# Altium PCB Tesla_MMC.PcbDoc
Units mm, origin at the board's own origin, x right, y up, seen from the top; angles counter-clockwise.
Board outline 180 x 234 mm, 2 copper layers (Top Layer, Bottom Layer); 46 components, 5 nets, 96 pads, 0 vias.
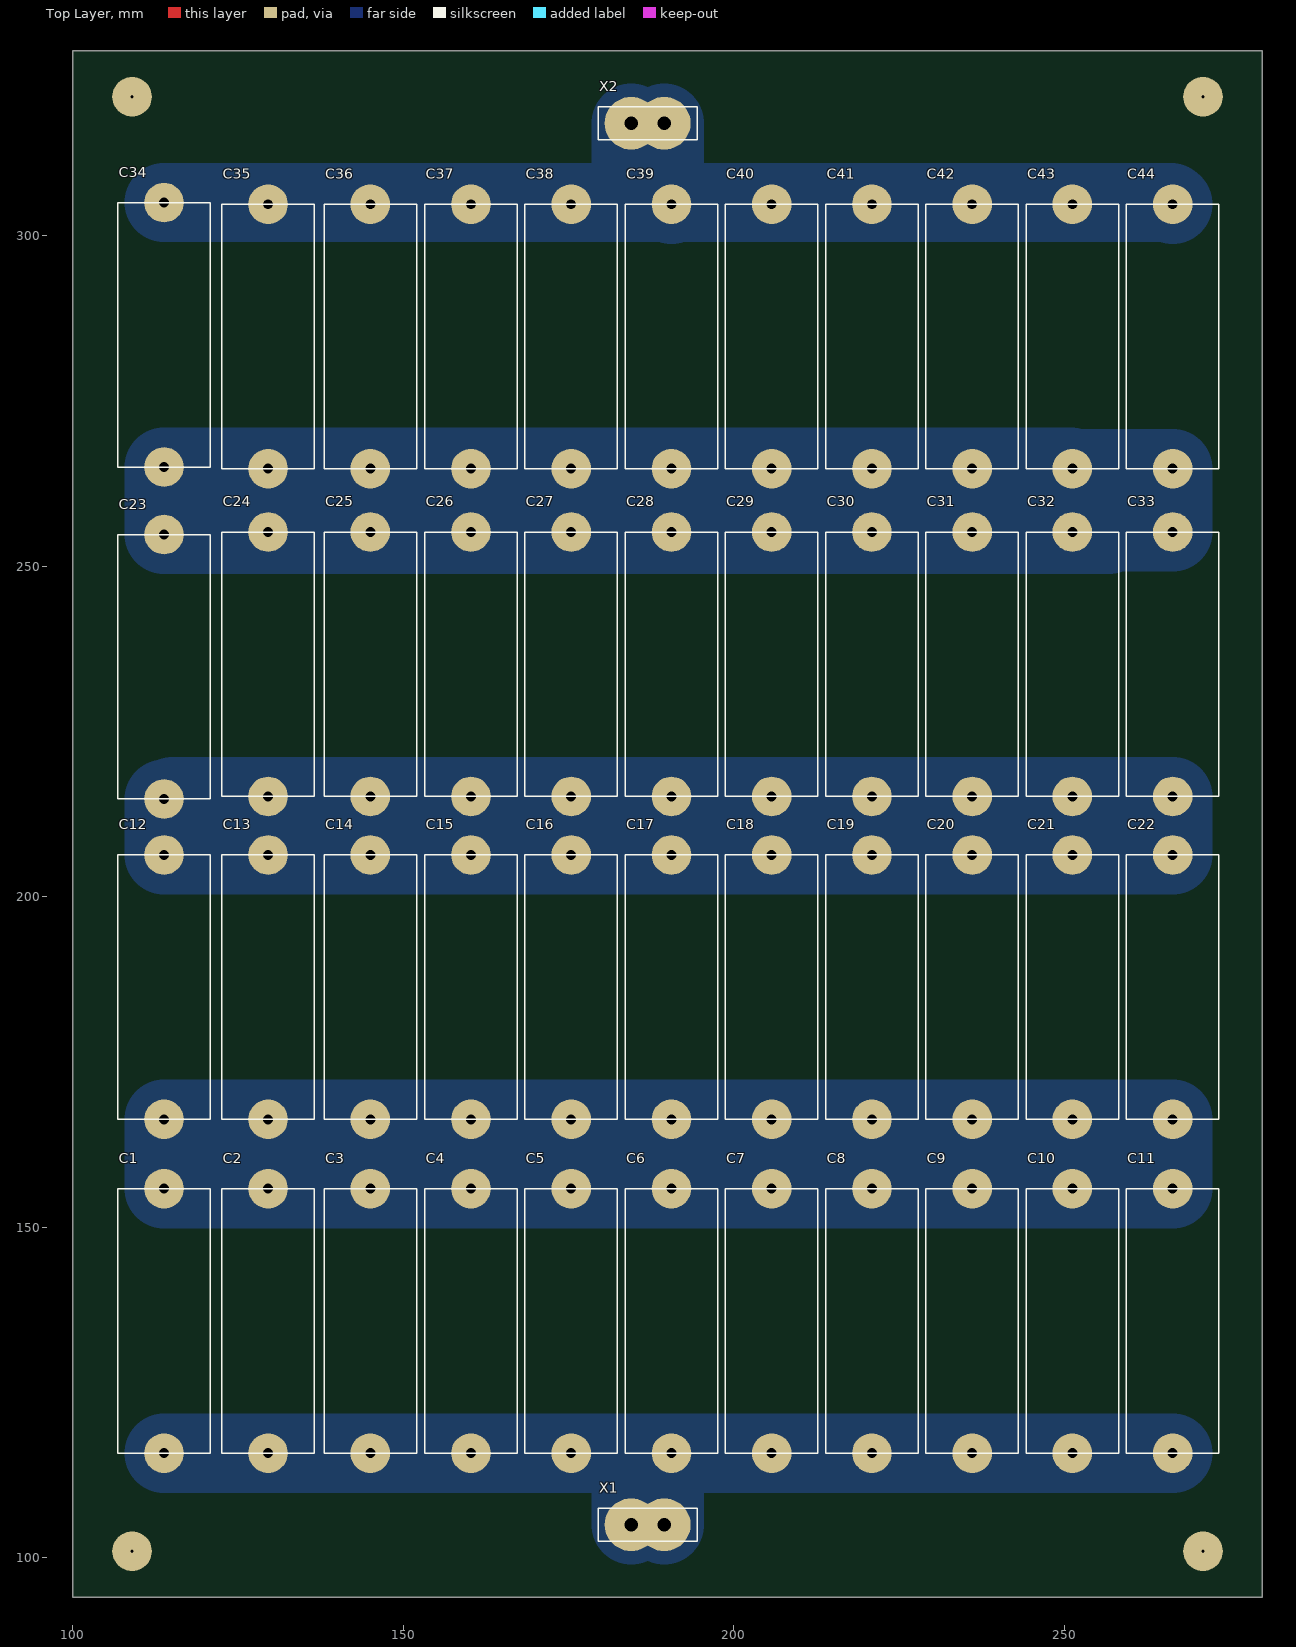
[diagram p0: Top Layer view]
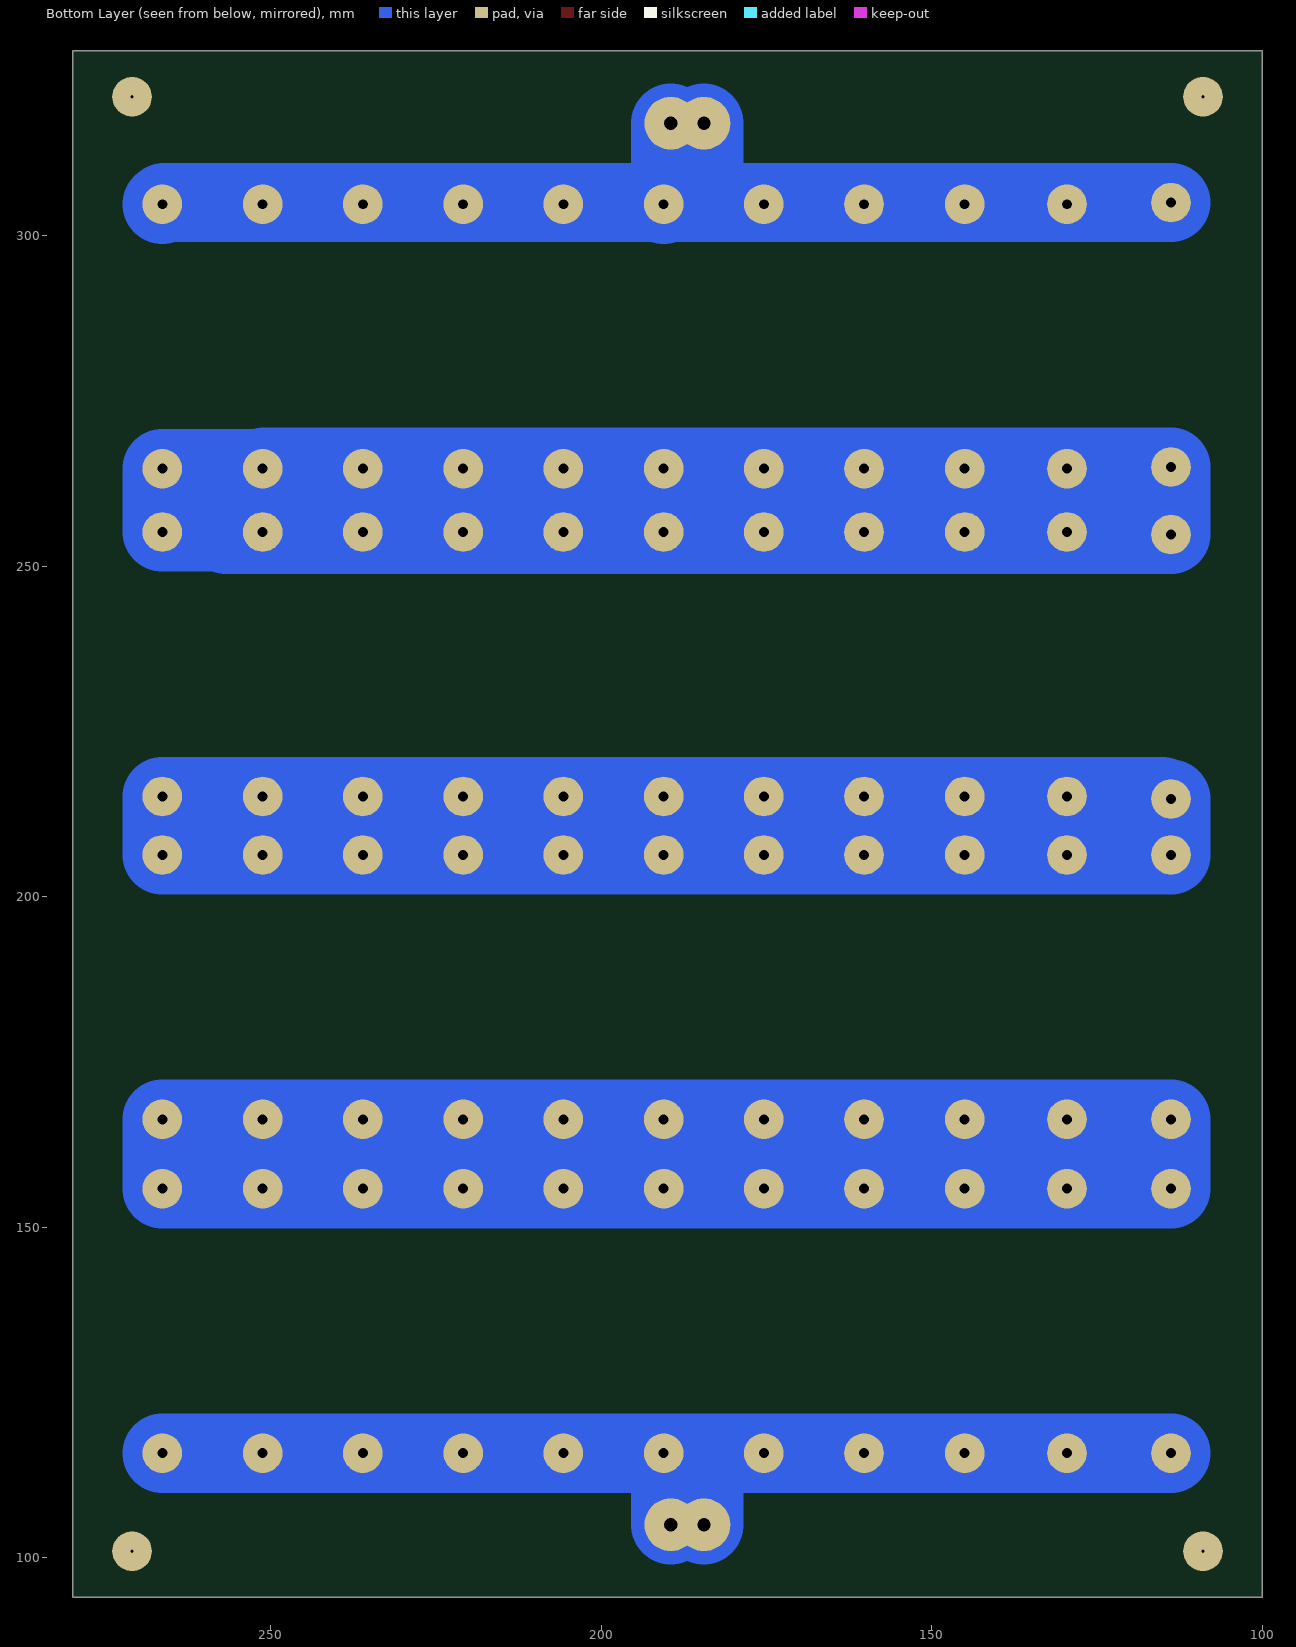
[diagram p1: Bottom Layer view, seen from below]

## Layer stack, top to bottom
Top Layer: signal copper 0.0356
Dielectric: core 0.32, FR-4, Dk 4.8
Bottom Layer: signal copper 0.0356

## Board outline
100,94 100,328 280,328 280,94

## Design rules (kind name [scope] priority, off if disabled: settings)
Clearance "Clearance_GND_VCC +3.3" [InNet('GND') vs InNet('VCC +3.3')] p1 off: gap=0.2
Clearance Clearance_U3_Trace [(IsTrack  And IsNet)  And InRegion(3815,3770 ,4275 ,4280) vs (IsTrack  And IsNet)  And InRegion(3815,3770 ,4275 ,4280)] p2: gap=0.2
Clearance Clearance_QFP_NET [InNet('SPI_MISO/DO','SPI_MOSI/DI','GND','VCC','GDO2','GDO0','SPI_SS','SPI_SCK','NetC3_1','NetC2_1','GND','NetC1_2','NetANT1_1','NetR1_2')  And InRegion(3815,3770 ,4275 ,4280) vs InNet('SPI_MISO','SPI_MOSI','GND','VCC','GDO2','GDO0','SPI_SS','SPI_SCK','NetC3_1','NetC2_1','GND')  And InRegion(3815,3770 ,4275 ,4280)] p3: gap=0.2
Clearance Clearance_QFP_Pins [InComponent('U1') And IsPad] p4: gap=0.2
Clearance Clearance_GND [InPolygon] p5: gap=0.5
Clearance [All] p6: gap=0.3
ComponentClearance ComponentClearance_R1_C10 [InComponent('C10') vs InComponent('R1')] p1 off: gap=0 collisioncheckmode=3 verticalgap=0 showdistances=FALSE
ComponentClearance [All] p2 off: gap=0.3 collisioncheckmode=3 verticalgap=0.3 showdistances=FALSE
Height [All] p1: minheight=0 maxheight=254 prefheight=12.7
HoleSize [All] p1: absolutevalues=TRUE maxlimit=5 minlimit=0.3 maxpercent=80.000 minpercent=20.000
NetAntennae [All] p1: netantennaetolerance=50
PlaneConnect [All] p1: planeconnectstyle=Relief reliefexpansion=0.508 reliefentries=4 reliefconductorwidth=0.3 reliefairgap=0.3
PolygonConnect [All] p1: connectstyle=Relief reliefconductorwidth=0.5 reliefentries=4 polygonreliefangle="90 Angle"
RoutingCorners [All] p1: cornerstyle=45-Degree minsetback=2.54 maxsetback=5
RoutingVias [All] p1: holewidth=0.5 width=1.6 viastyle="Through Hole" minholewidth=0.3 minwidth=1 maxholewidth=1 maxwidth=2
ShortCircuit ShortCircuit_ANT1 [InComponent('ANT1')] p1: allowed=TRUE
ShortCircuit [All] p2: allowed=FALSE
SilkToSilkClearance [All] p1: silktosilkclearance=0.3
SilkscreenOverComponentPads [All] p1 off: minsilkscreentomaskgap=0.254
SolderMaskExpansion [All] p1: expansion=0.102
Width [All] p1: maxlimit=25 minlimit=0.2 preferedwidth=0.3
19 further rules are at their usual default settings.

## Components (designator, comment, footprint, x,y, rotation, side; value= is the part's Value field where it differs from the comment)
C1 "K78-2" "Capasitor K78-2" 113.837,135.831 r90 top
C2 "K78-2" "Capasitor K78-2" 129.576,135.831 r90 top
C3 "K78-2" "Capasitor K78-2" 145.044,135.831 r90 top
C4 "K78-2" "Capasitor K78-2" 160.265,135.831 r90 top
C5 "K78-2" "Capasitor K78-2" 175.429,135.831 r90 top
C6 "K78-2" "Capasitor K78-2" 190.593,135.831 r90 top
C7 "K78-2" "Capasitor K78-2" 205.757,135.831 r90 top
C8 "K78-2" "Capasitor K78-2" 220.921,135.831 r90 top
C9 "K78-2" "Capasitor K78-2" 236.084,135.831 r90 top
C10 "K78-2" "Capasitor K78-2" 251.248,135.831 r90 top
C11 "K78-2" "Capasitor K78-2" 266.412,135.831 r90 top
C12 "K78-2" "Capasitor K78-2" 113.837,186.317 r90 top
C13 "K78-2" "Capasitor K78-2" 129.576,186.317 r90 top
C14 "K78-2" "Capasitor K78-2" 145.044,186.317 r90 top
C15 "K78-2" "Capasitor K78-2" 160.265,186.317 r90 top
C16 "K78-2" "Capasitor K78-2" 175.429,186.317 r90 top
C17 "K78-2" "Capasitor K78-2" 190.593,186.317 r90 top
C18 "K78-2" "Capasitor K78-2" 205.757,186.317 r90 top
C19 "K78-2" "Capasitor K78-2" 220.921,186.317 r90 top
C20 "K78-2" "Capasitor K78-2" 236.084,186.317 r90 top
C21 "K78-2" "Capasitor K78-2" 251.248,186.317 r90 top
C22 "K78-2" "Capasitor K78-2" 266.412,186.317 r90 top
C23 "K78-2" "Capasitor K78-2" 113.837,234.787 r90 top
C24 "K78-2" "Capasitor K78-2" 129.576,235.168 r90 top
C25 "K78-2" "Capasitor K78-2" 145.044,235.168 r90 top
C26 "K78-2" "Capasitor K78-2" 160.265,235.168 r90 top
C27 "K78-2" "Capasitor K78-2" 175.429,235.168 r90 top
C28 "K78-2" "Capasitor K78-2" 190.593,235.168 r90 top
C29 "K78-2" "Capasitor K78-2" 205.757,235.168 r90 top
C30 "K78-2" "Capasitor K78-2" 220.921,235.168 r90 top
C31 "K78-2" "Capasitor K78-2" 236.084,235.168 r90 top
C32 "K78-2" "Capasitor K78-2" 251.248,235.168 r90 top
C33 "K78-2" "Capasitor K78-2" 266.412,235.168 r90 top
C34 "K78-2" "Capasitor K78-2" 113.837,285.003 r90 top
C35 "K78-2" "Capasitor K78-2" 129.576,284.749 r90 top
C36 "K78-2" "Capasitor K78-2" 145.044,284.749 r90 top
C37 "K78-2" "Capasitor K78-2" 160.265,284.749 r90 top
C38 "K78-2" "Capasitor K78-2" 175.429,284.749 r90 top
C39 "K78-2" "Capasitor K78-2" 190.593,284.749 r90 top
C40 "K78-2" "Capasitor K78-2" 205.757,284.749 r90 top
C41 "K78-2" "Capasitor K78-2" 220.921,284.749 r90 top
C42 "K78-2" "Capasitor K78-2" 236.084,284.749 r90 top
C43 "K78-2" "Capasitor K78-2" 251.248,284.749 r90 top
C44 "K78-2" "Capasitor K78-2" 266.412,284.749 r90 top
X1 "TA-M" TA-M 187,105 r180 top
X2 "TA-M" TA-M 187,317 r180 top

## Footprints (in the part's own frame and the unit in brackets; to place one, negate y for a bottom-side part, rotate by r counter-clockwise, add the part's x,y. Pads: shape width x height; smd on the part's side, far side on the other; paste and mask are expansions set on the pad)
"Capasitor K78-2" [mm]
  round 6 hole 1.5: 1(-20,0) 2(20,0)
  silkscreen extent -20,-7 20,7
TA-M [mm]
  round 8 hole 2: 1(-2.5,0) 1(2.5,0)
  silkscreen extent -7.5,-2.5 7.5,2.5

## Part data
C1 C2 C3 C4 C5 C6 C7 C8 C9 C10 C11 C12 C13 C14 C15 C16 C17 C18 C19 C20 C21 C22 C23 C24 C25 C26 C27 C28 C29 C30 C31 C32 C33 C34 C35 C36 C37 C38 C39 C40 C41 C42 C43 C44: library part Capasitor_K78-2

## Free pads (board coordinates)
  round 6 hole 0.5: 0(109,321) 2(109,101) 3(271,321) 4(271,101)

## Nets (pads, with @x,y where several pads share a name; then routed paths per layer and width w, separated by ;. In a path a pad name is that pad's centre, name@x,y a point inside that pad or via, vN(x,y) a via of type N, cw(c..) or ccw(c..) an arc to the next point about the centre after c; other vN are vias at no path point)
NetC1_1: C1.1 C2.1 C3.1 C4.1 C5.1 C6.1 C7.1 C8.1 C9.1 C10.1 C11.1 X1.1 | length 168.6
  Bottom Layer w12: C1.1 C2.1 C3.1 C4.1 C5.1 C6.1 ; X1.1@184.5,105 184.5,109.738 ; X1.1@189.5,105 189.5,114.738 C6.1 ; C11.1 C10.1 C9.1 C8.1 C7.1 C6.1
NetC1_2: C1.2 C2.2 C3.2 C4.2 C5.2 C6.2 C7.2 C8.2 C9.2 C10.2 C11.2 C12.1 C13.1 C14.1 C15.1 C16.1 C17.1 C18.1 C19.1 C20.1 C21.1 C22.1 | length 326.1
  Bottom Layer w12: C1.2 C2.2 C3.2 C4.2 C5.2 C6.2 C7.2 C8.2 C9.2 C10.2 C11.2 C22.1 C21.1 C20.1 C19.1 C18.1 C17.1 C16.1 C15.1 C14.1 C13.1 C12.1 C1.2
NetC12_2: C12.2 C13.2 C14.2 C15.2 C16.2 C17.2 C18.2 C19.2 C20.2 C21.2 C22.2 C23.1 C24.1 C25.1 C26.1 C27.1 C28.1 C29.1 C30.1 C31.1 C32.1 C33.1 | length 322.8
  Bottom Layer w12: C23.1 C12.2 C13.2 C14.2 C15.2 C16.2 C17.2 C18.2 C19.2 C20.2 C21.2 C22.2 C33.1 C32.1 C31.1 C30.1 C29.1 C28.1 C27.1 C26.1 C25.1 C24.1 115.168,215.168 C23.1@114,214
NetC23_2: C23.2 C24.2 C25.2 C26.2 C27.2 C28.2 C29.2 C30.2 C31.2 C32.2 C33.2 C34.1 C35.1 C36.1 C37.1 C38.1 C39.1 C40.1 C41.1 C42.1 C43.1 C44.1 | length 331.1
  Bottom Layer w12: C32.2 257.112,255.168 ; 257.112,255.168 C33.2 C44.1 C43.1 250.994,265.003 205.757,265.003 C34.1 C23.2 145.044,254.787 205.757,254.787 256.731,254.787 257.112,255.168
NetC34_2: C34.2 C35.2 C36.2 C37.2 C38.2 C39.2 C40.2 C41.2 C42.2 C43.2 C44.2 X2.1 | length 178.6
  Bottom Layer w12: C34.2 160.265,305.003 C39.2@190.339,305.003 ; X2.1@184.5,317 184.5,310.842 C39.2@189.5,305.842 ; X2.1@189.5,317 C39.2@189.5,305.842 ; C39.2 C39.2@190.339,305.003 ; C44.2 266.158,305.003 251.248,305.003 205.757,305.003 C39.2@190.339,305.003 ; C39.2@189.5,305.842 C39.2@190.339,305.003